# Altium PCB test.PcbDoc
Units mil, origin at the board's own origin, x right, y up, seen from the top; angles counter-clockwise.
Board outline 3295 x 3315 mil, 2 copper layers (Top Layer, Bottom Layer); 58 components, 40 nets, 178 pads, 24 vias.
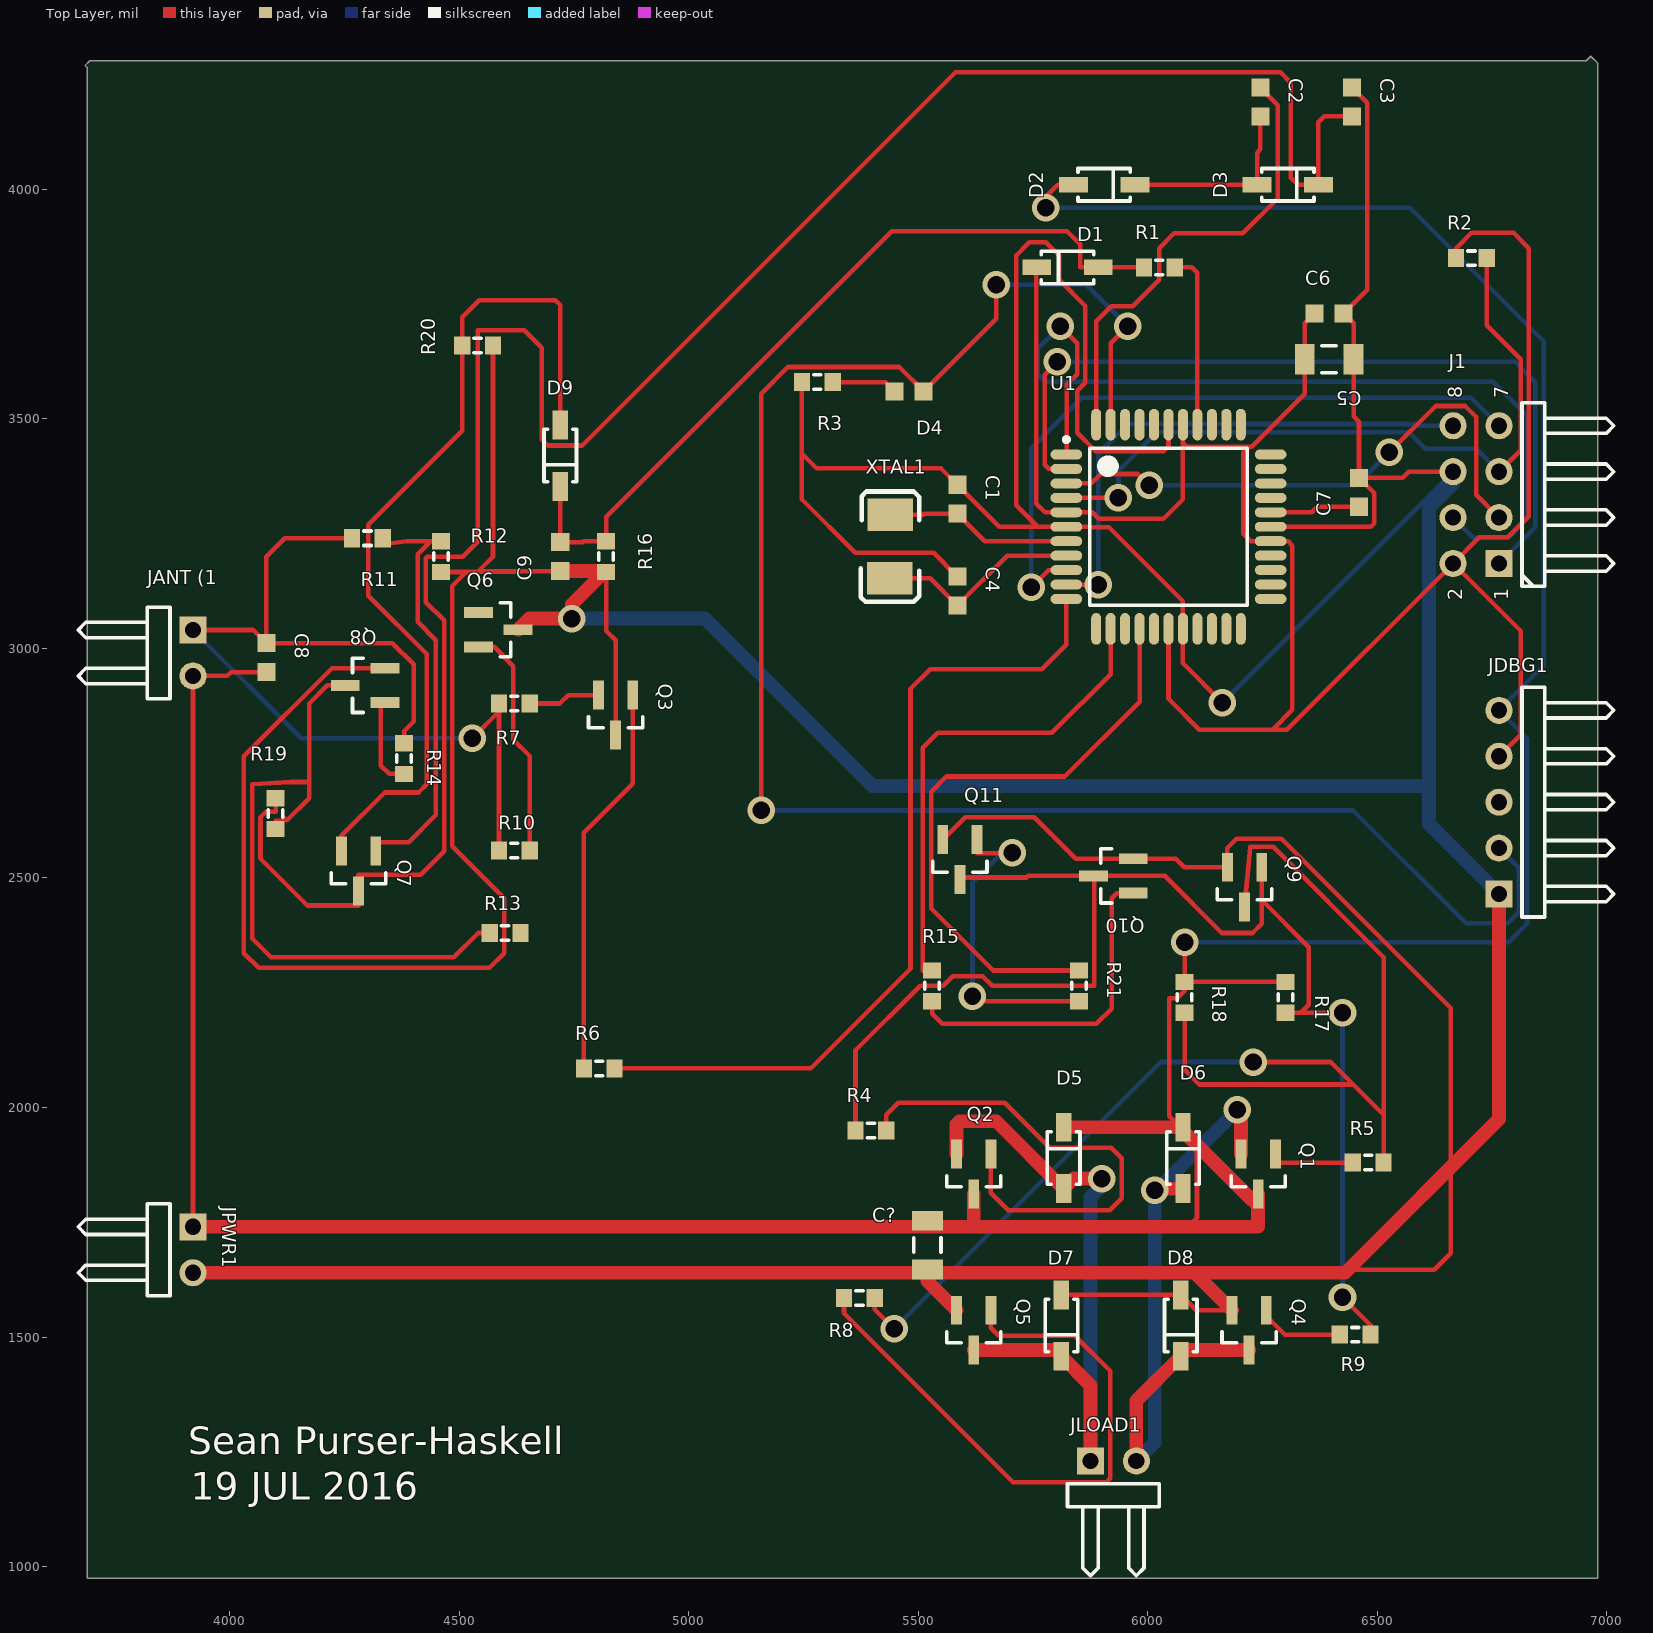
[diagram p0: Top Layer view]
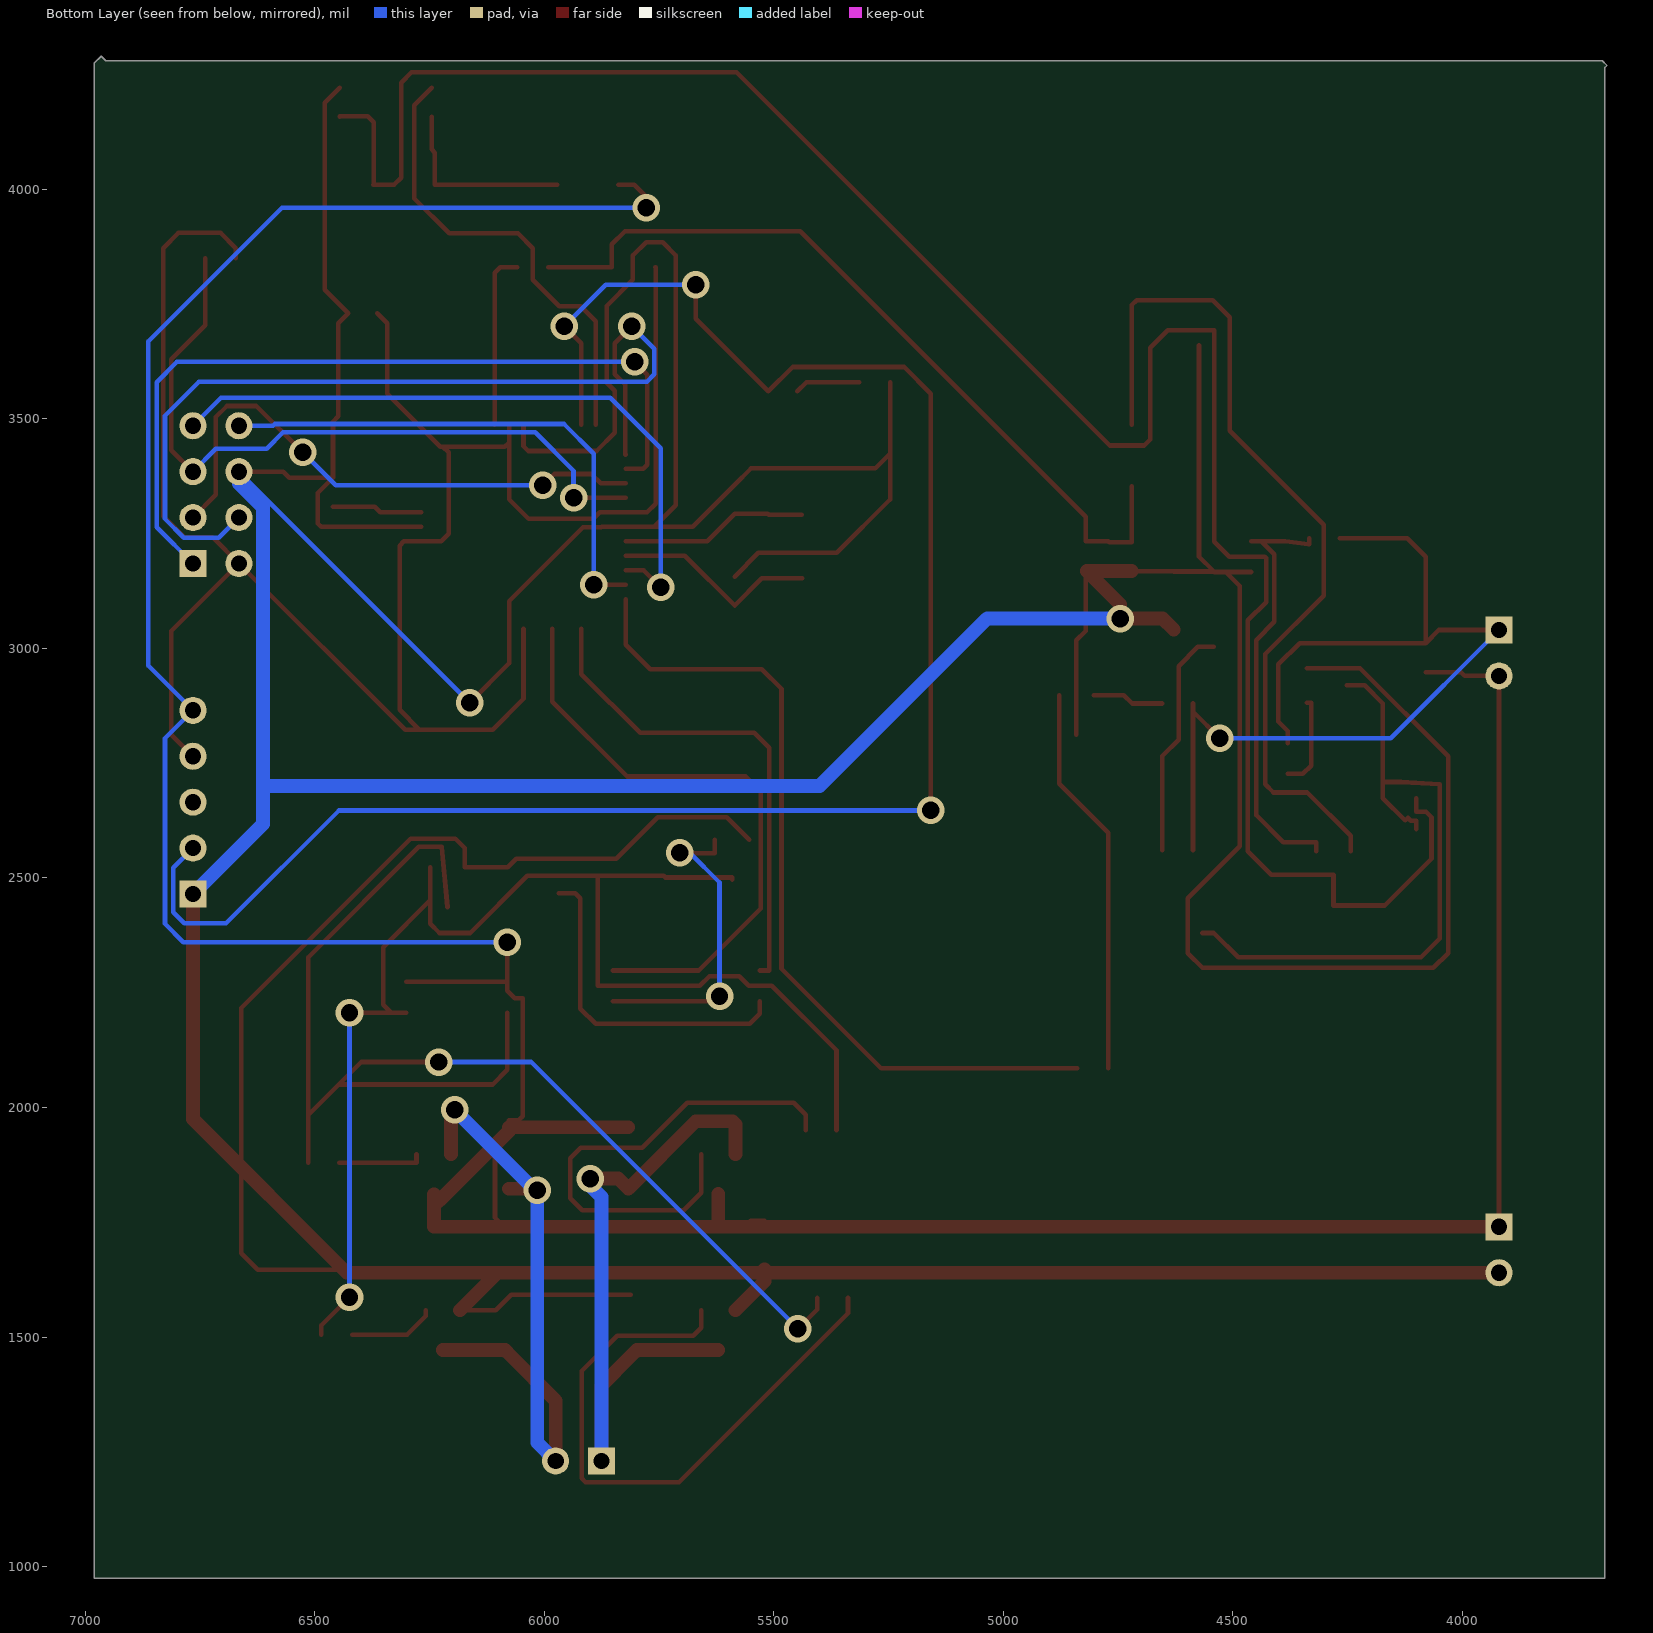
[diagram p1: Bottom Layer view, seen from below]

## Layer stack, top to bottom
Top Layer: signal copper 1.4
Dielectric: dielectric 12.6, FR-4, Dk 4.8
Bottom Layer: signal copper 1.4

## Board outline
5990,975 3690,975 3690,4265 3685,4270 3695,4280 6800,4280 6955,4280 6965,4290 6980,4275 6980,975

## Design rules (kind name [scope] priority, off if disabled: settings)
Clearance [All] p1: gap=8
MinimumSolderMaskSliver [All] p1: minsoldermaskwidth=0
PolygonConnect [All] p1: connectstyle=Relief reliefconductorwidth=10 reliefentries=4 polygonreliefangle="90 Angle"
RoomDefinition test [InComponentClass('test')] p1 off: confinementstyle=ConfineIn formatcopy=TRUE lockcomponents=FALSE outline 7025,1035 7205,1035 7205,1225 7025,1225
RoutingVias [All] p1: holewidth=38 width=60 viastyle="Through Hole" minholewidth=38 minwidth=60 maxholewidth=100 maxwidth=100
SilkToSilkClearance [All] p1: silktosilkclearance=7
SilkscreenOverComponentPads [All] p1: minsilkscreentomaskgap=1
SolderMaskExpansion [All] p1: expansion=4
Width [All] p1: maxlimit=100 minlimit=8 preferedwidth=10 minimp=50.000000 maximp=50.000000 favimp=50.000000
25 further rules are at their usual default settings.

## Components (designator, comment, footprint, x,y, rotation, side; value= is the part's Value field where it differs from the comment)
C1 "18pF" CAPC1608N 5585,3325 r270 top
C2 "10uF" CAPC1608N 6245,4190 r270 top
C3 "10uF" CAPC1608N 6445,4190 r270 top
C4 "18pF" CAPC1608N 5585,3125 r270 top
C5 "10uF" CAPC3216L 6395,3630 r180 top
C6 "100nF" CAPC1608N 6395,3730 r0 top
C7 "100nF" CAPC1608N 6460,3340 r90 top
C8 "3320pF" CAPC1608N 4080,2980 r270 top
C9 "1uF" CAPC1608N 4720,3200 r90 top
C? "10uF" CAPC3216L 5520,1700 r90 top
D1 "MBR0540" SOD123/X.85 5825,3830 r0 top
D2 "MBR0540" SOD123/X.85 5905,4010 r180 top
D3 "MBR0540" SOD123/X.85 6305,4010 r180 top
D4 "LED3" CAPC1608N 5480,3560 r180 top
D5 "MBR0540" SOD123/X.85 5816.69,1890 r270 top
D6 "MBR0540" SOD123/X.85 6076.69,1890 r270 top
D7 "MBR0540" SOD123/X.85 5811.69,1525 r90 top
D8 "MBR0540" SOD123/X.85 6071.69,1525 r90 top
D9 "MBR0540" SOD123/X.85 4720,3420 r90 top
J1 "XSP" HDR2X4H 6765,3185 r90 top
"JANT (1" "Header 2H" HDR1X2H 3920,3040 r270 top
JDBG1 "Header 5H" HDR1X5H 6765,2465 r90 top
JLOAD1 "Header 2H" HDR1X2H 5875,1230 r0 top
JPWR1 "Header 2H" HDR1X2H 3920,1740 r270 top
Q1 "BSS806N" BSS806N 6240,1880 r270 top
Q2 "BSS806N" BSS806N 5620,1880 r270 top
Q3 "BSS806N" BSS806N 4840,2880 r270 top
Q4 "BSS806N" BSS806N 6220,1540 r270 top
Q5 "BSS806N" BSS806N 5620,1540 r270 top
Q6 "BSS806N" BSS806N 4560,3040 r0 top
Q7 "BSS806N" BSS806N 4280,2540 r270 top
Q8 "BSS806N" BSS806N 4320,2920 r180 top
Q9 "BSS806N" BSS806N 6210,2505 r270 top
Q10 "BSS806N" BSS806N 5950,2505 r180 top
Q11 "BSS806N" BSS806N 5590,2565 r270 top
R1 "10k" RESC1608N 6025,3830 r0 top
R2 "10k" RESC1608N 6705,3850 r0 top
R3 "300" RESC1608N 5280,3580 r180 top
R4 "100" RESC1608N 5396.69,1950 r0 top
R5 "100" RESC1608N 6480,1880 r0 top
R6 "100" RESC1608N 4805,2085 r0 top
R7 "10" RESC1608N 4620,2880 r0 top
R8 "100" RESC1608N 5371.69,1585 r180 top
R9 "100" RESC1608N 6451.69,1505 r0 top
R10 "50" RESC1608N 4620,2560 r0 top
R11 "10k" RESC1608N 4300,3240 r180 top
R12 "10k" RESC1608N 4460,3200 r90 top
R13 "100" RESC1608N 4600,2380 r180 top
R14 "100" RESC1608N 4380,2760 r270 top
R15 "100" RESC1608N 5530,2265 r90 top
R16 "100k" RESC1608N 4820,3200 r90 top
R17 "1k" RESC1608N 6300,2240 r270 top
R18 "1k" RESC1608N 6080,2240 r270 top
R19 "1k" RESC1608N 4100,2640 r270 top
R20 "10k" RESC1608N 4540,3660 r180 top
R21 "100" RESC1608N 5850,2265 r270 top
U1 "ATmega644A-AU" 44A_N 6045,3265 r0 top
XTAL1 "ABM7-8.000MHZ-D2Y-T" XTAL 5425,3225 r270 top

## Footprints (in the part's own frame and the unit in brackets; to place one, negate y for a bottom-side part, rotate by r counter-clockwise, add the part's x,y. Pads: shape width x height; smd on the part's side, far side on the other; paste and mask are expansions set on the pad)
44A_N [mm] "Thin QFP, 44-Leads, Body 10x10mm, Pitch 0.8mm, IPC Medium Density"
  oval 1.75x0.55 smd: 1(-5.65,4) 2(-5.65,3.2) 3(-5.65,2.4) 4(-5.65,1.6) 5(-5.65,0.8) 6(-5.65,0) 7(-5.65,-0.8) 8(-5.65,-1.6) 9(-5.65,-2.4) 10(-5.65,-3.2) 11(-5.65,-4) 23(5.65,-4) 24(5.65,-3.2) 25(5.65,-2.4) 26(5.65,-1.6) 27(5.65,-0.8) 28(5.65,0) 29(5.65,0.8) 30(5.65,1.6) 31(5.65,2.4) 32(5.65,3.2) 33(5.65,4)
  oval 0.55x1.75 smd: 12(-4,-5.65) 13(-3.2,-5.65) 14(-2.4,-5.65) 15(-1.6,-5.65) 16(-0.8,-5.65) 17(0,-5.65) 18(0.8,-5.65) 19(1.6,-5.65) 20(2.4,-5.65) 21(3.2,-5.65) 22(4,-5.65) 34(4,5.65) 35(3.2,5.65) 36(2.4,5.65) 37(1.6,5.65) 38(0.8,5.65) 39(0,5.65) 40(-0.8,5.65) 41(-1.6,5.65) 42(-2.4,5.65) 43(-3.2,5.65) 44(-4,5.65)
  silkscreen extent -5.77,-4.35 4.35,4.95, body extent -5,-5 5,5, height 1.2
BSS806N [mm]
  rect 1.6x0.6 smd: 1(-0.465,0.966) 2(-0.465,-0.934) 3(1.735,0.016)
  silkscreen extent 0.74,-1.48 1.34,1.52, body extent -0.07,-1.48 1.34,1.52, height 1.1
CAPC1608N [mm] "Chip Capacitor, Body 1.6x0.8mm, IPC Medium Density"
  rect 1x1 smd: 1(-0.8,0) 2(0.8,0)
  body extent -0.87,-0.48 0.87,0.48, height 0.85
CAPC3216L [mm] "Chip Capacitor, Body 3.2x1.6mm, IPC High Density"
  rect 1.1x1.7 smd: 1(-1.35,0) 2(1.35,0)
  silkscreen extent -0.4,-0.75 0.4,0.75, body extent -1.7,-0.9 1.7,0.9, height 1.3
HDR1X2H [mm] "Connector; Header; 2 Position; Right Angle"
  rect 1.5x1.5 hole 0.9: 1(0,0)
  round 1.5 hole 0.9: 2(2.54,0)
  silkscreen extent -1.27,-6.35 3.81,-1.27
HDR1X5H [mm] "Connector; Header; 5 Position; Right Angle"
  rect 1.5x1.5 hole 0.9: 1(0,0)
  round 1.5 hole 0.9: 2(2.54,0) 3(5.08,0) 4(7.62,0) 5(10.16,0)
  silkscreen extent -1.27,-6.35 11.43,-1.27
HDR2X4H [mm] "Connector; Header; 4x2 Position; Right Angle"
  rect 1.5x1.5 hole 0.9: 1(0,0)
  round 1.5 hole 0.9: 2(0,2.54) 3(2.54,0) 4(2.54,2.54) 5(5.08,0) 6(5.08,2.54) 7(7.62,0) 8(7.62,2.54)
  silkscreen extent -1.27,-6.35 8.89,-1.27
RESC1608N [mm] "Chip Resistor, Body 1.6x0.8mm, IPC Medium Density"
  rect 0.9x1 smd: 1(-0.85,0) 2(0.85,0)
  silkscreen extent -0.2,-0.4 0.2,0.4, body extent -0.85,-0.48 0.85,0.48, height 0.6
SOD123/X.85 [mm] "SOD-123; 2 Leads; Body 2.7 x 1.6 mm, (LxW)"
  rect 1.6x0.85 smd: 1(-1.7,0) 2(1.7,0)
  silkscreen extent -1.45,-0.9 1.45,0.9
XTAL [mm]
  rect 1.8x2.5 smd: 1(1.834,0.329) 2(-1.691,0.354)
  silkscreen extent -2.97,-1.27 3.13,1.95, body extent -2.2,-0.89 2.49,1.4, height 2.54

## Part data
C1 C2 C3 C4 C5 C8 C9 C?: library part Cap, "Capacitor"
C6 C7: library part CAP, "Capacitor"
D1 D2 D3 D5 D6 D7 D8 D9: library part Diode, "Default Diode"
D4: "Typical BLUE SiC LED"
J1: library part "Header 4X2H", "Header, 4-Pin, Dual row, Right Angle"
"JANT (1" JLOAD1 JPWR1: "Header, 2-Pin, Right Angle"
JDBG1: "Header, 5-Pin, Right Angle"
R1 R2 R3 R4 R5 R6 R7 R8 R9 R10 R11 R12 R13 R14 R15 R16 R17 R18 R19 R20 R21: library part Res2, "Resistor"
U1: "8-bit AVR Microcontroller, 64KB Flash, 2KB EEPROM, 4KB SRAM, 44-pin TQFP, Industrial Grade (-40°C to 85°C)"

## Via types
v1: diameter 60, hole 38, Top Layer to Bottom Layer, 24 vias

## Nets (pads, with @x,y where several pads share a name; then routed paths per layer and width w, separated by ;. In a path a pad name is that pad's centre, name@x,y a point inside that pad or via, vN(x,y) a via of type N, cw(c..) or ccw(c..) an arc to the next point about the centre after c; other vN are vias at no path point)
DBG_LED: D4.1 JDBG1.2 U1.43 | length 4077.9
  Top Layer w10: v1(5158,2647) 5158,3555 5216,3613 5458.5,3613 D4.1 5670,3718.5 v1(5670,3792) ; U1.43 5919.02,3665.02 v1(5956,3702)
  Bottom Layer w10: v1(5158,2647) 6447,2647 6693,2401 6784,2401 6808,2425 6808,2522 JDBG1.2 ; v1(5670,3792) 5866,3792 v1(5956,3702)
DBL_WAVE: C2.1 U1.44 | length 1029.3
  Top Layer w10: U1.44 5887.52,3713.04 5920,3745.52 5967.52,3745.52 6025,3803 6025,3872 6057,3904 6207,3904 6283,3980 6283,4183.5 C2.1
GND: C1.1 C3.1 C4.1 C5.1 C6.2 C7.2 C9.1 C?.1 D7.2 D8.2 J1.6 JDBG1.1 JPWR1.2 Q3.3 Q4.2 Q5.2 Q6.3 Q8.2 Q9.2 Q10.2 Q11.2 R3.2 R12.1 R16.1 R20.1 U1.6 U1.18 U1.28 U1.39 | length 19948.2
  Top Layer w10: Q8.2 4222.77,2956.77 4031,2765 4031,2336 4063,2304 4566,2304 4598,2336 4598,2456 4485,2569 4485,3136 4515.54,3166.54 ; R12.1 4515.54,3166.54 ; R20.1 4573.46,3200 4541.97,3168.5 ; Q3.3 4840.63,3017.37 4820,3038 R16.1 4816.06,3166.54 4770.97,3166.54 4769,3168.5 C9.1 ; C?.1 6436.85,1646.85 6624,1646.85 6660,1682.85 6660,1870 6660,2216.65 6290.84,2585.8 6193.8,2585.8 6173.23,2565.23 Q9.2 6079.47,2523.31 6061,2541.77 Q10.2 5843.23,2541.77 5753,2632 5601.92,2632 Q11.2 ; C4.1 5533.5,3208 5363,3208 5246.54,3324.46 5246.54,3424 ; D7.2 D8.2 6105.32,1558.31 Q4.2 ; U1.39 6045,3440 6035,3430 5886,3430 5846,3470 5846,3561 5864,3579 5864,3745.85 5806.65,3803.2 5806.65,3856 5777.65,3885 5742,3885 5713,3856 5713,3312 5760,3265 ; v1(6162,2882) 6076.5,2967.5 U1.18 6076.5,3103 5915.5,3264 5876,3264 5875,3265 U1.6 ; U1.28 6486,3265 6493,3272 6493,3338.5 C7.2 ; C3.1 6478,4188.5 6478,3781.5 C6.2 6448.15,3708.35 C5.1 6448.15,3505.85 6460,3494 C7.2 ; J1.6 6568.5,3385 6555,3371.5 C7.2 ; 4515.54,3166.54 4540,3166.54 ; 4515.54,3166.54 4540,3166.54 ; 4540,3166.54 4541.97,3168.5 ; 4540,3166.54 4541.97,3168.5 ; 4540,3166.54 C9.1 ; 4541.97,3168.5 C9.1 ; 5246.54,3424 5278.54,3392 5549.5,3392 C1.1 5676.5,3265 5760,3265 ; 5246.54,3424 R3.2 5246.54,3424 ; 5760,3265 U1.6 ; 5760,3265 U1.6
  Top Layer w30: JPWR1.2 5660,1640 6085,1640 6101.53,1640 ; Q6.3 4652.68,3065 v1(4745,3065) 4745,3095.47 4818.03,3168.5 C9.1 ; C?.1 5520,1640 5520,1621.53 Q5.2 ; Q4.2 6101.53,1640 ; JDBG1.1 6765,1975 6430,1640 6101.53,1640
  Bottom Layer w10: v1(6162,2882) J1.6
  Bottom Layer w30: v1(4745,3065) 5035,3065 5400,2700 6612.47,2700 ; J1.6 6665,3359.29 6612.47,3306.76 6612.47,2700 ; JDBG1.1 6612.47,2617.53 6612.47,2700
LOAD_A: Q9.1 Q10.3 Q11.3 R4.1 R9.2 R17.2 | length 3107.2
  Top Layer w10: R4.1 5363.23,2124.23 5504,2265 5553.93,2265 5574.87,2285.94 5639.93,2285.94 5660.87,2265 5883,2265 Q10.3@5883,2504.37 ; Q11.3 5590.63,2501.02 5736.33,2501.02 5739.68,2504.37 Q10.3 ; v1(6424,1587) 6485.16,1525.84 R9.2 ; v1(6424,2206.54) 6333.22,2206.54 ; Q10.3 Q10.3@5883,2504.37 ; Q10.3 Q10.3@5883,2504.37 ; Q10.3@5883,2504.37 6037,2504.37 6161.37,2380 6228.03,2380 6248.03,2400 6248.03,2451.97 ; 6248.03,2451.97 Q9.1 6248.03,2451.97 ; 6248.03,2451.97 6350.69,2349.31 6350.69,2224 6333.22,2206.54 ; 6333.22,2206.54 R17.2 6333.22,2206.54
  Bottom Layer w10: v1(6424,1587) v1(6424,2206.54)
LOAD_B: Q9.3 R5.2 R8.1 R18.2 | length 3110.7
  Top Layer w10: R8.1 5405.16,1560 v1(5447.16,1518) ; R18.2 6080,2082 6112,2050 6447.46,2050 ; Q9.3 6223,2567.8 6273,2567.8 6513.46,2327.34 6513.46,1984 ; v1(6230,2099) 6398.46,2099 6447.46,2050 ; 6447.46,2050 6513.46,1984 ; 6447.46,2050 6513.46,1984 ; 6513.46,1984 R5.2 6513.46,1984
  Bottom Layer w10: v1(5447.16,1518) 6028.16,2099 v1(6230,2099)
LOAD_DIR: R21.1 U1.15 | length 1326.2
  Top Layer w10: R21.1 5663,2298.46 5528,2433.46 5528,2688 5561,2721 5819,2721 5982.01,2884.01 U1.15
LOAD_EN: R15.2 U1.13 | length 1079.4
  Top Layer w10: R15.2 5510,2298.46 5510,2784 5542,2816 5791.02,2816 5919.02,2944 U1.13
MISO: J1.1 U1.2 | length 1773.8
  Top Layer w10: v1(5803,3624) 5775.11,3596.11 5775.11,3399.87 5784,3390.98 U1.2
  Bottom Layer w10: v1(5803,3624) 6800,3624 6844,3580 6844,3264 J1.1
MOSI: J1.4 U1.1 | length 1955.1
  Top Layer w10: v1(5809,3702) 5846,3665 5846,3597 5823.79,3574.79 5823.79,3422.48 U1.1
  Bottom Layer w10: v1(5809,3702) 5760,3653 5760,3597 5776,3581 6752,3581 6826,3507 6826,3282 6785,3241 6709,3241 J1.4
NetC1_2: C1.2 U1.7 XTAL1.2 | length 409.3
  Top Layer w10: XTAL1.2 5511,3291.58 5512.93,3293.5 C1.2 5645,3233.5 U1.7
NetC2_2: C2.2 D2.1 D3.2 | length 417.5
  Top Layer w10: D2.1 D3.2 6238.07,4080 6245,4086.93 C2.2
NetC4_2: C4.2 U1.8 XTAL1.1 | length 454.1
  Top Layer w10: XTAL1.1 5525.71,3152.8 C4.2 5693.5,3202.01 U1.8
NetC7_1: C7.1 U1.29 | length 197.5
  Top Layer w10: U1.29 6357,3296.5 6369.01,3308.5 C7.1
NetC8_1: "JANT (1.1" C8.1 R7.1 R10.1 R11.2 R14.1 | length 2209.7
  Top Layer w10: 3920,3040 4051.5,3040 C8.1 ; R11.2 4120,3240 4080,3200 C8.1 ; R14.1 4380,2820 4400.8,2840.8 4400.8,2965.2 4354.5,3011.5 C8.1 ; v1(4528,2804) R7.1@4586.54,2862.54 ; R10.1 R7.1@4586.54,2862.54 ; R7.1@4586.54,2862.54 R7.1 R7.1@4586.54,2862.54
  Bottom Layer w10: 3920,3040 4156,2804 v1(4528,2804)
NetD4_2: D4.2 R3.1 | length 143.3
  Top Layer w10: R3.1 5428.5,3580 D4.2
NetD5_2: D5.2 D7.1 JLOAD1.1 Q2.2 Q5.3 | length 1530.8
  Top Layer w30: Q2.2 5583.23,1963.23 5590,1970 5669.76,1970 D5.2 5838.62,1845 v1(5900,1845) ; Q5.3 5798.07,1471.69 D7.1 5875,1394.76 JLOAD1.1
  Bottom Layer w30: JLOAD1.1 5875,1805 5900,1830 v1(5900,1845)
NetD6_2: D6.2 D8.1 JLOAD1.2 Q1.2 Q4.3 | length 1454.2
  Top Layer w30: JLOAD1.2 5975,1361.38 D8.1 6085.31,1471.69 Q4.3 ; v1(6015,1820) 6018.07,1823.07 D6.2 ; v1(6195,1995) 6205,1995 6203.23,1993.23 Q1.2
  Bottom Layer w30: JLOAD1.2 6015,1270 v1@6015,1815 ; v1(6015,1820) v1@6015,1815 ; v1(6195,1995) 6017.5,1817.5 v1@6015,1815
NetD9_2: D9.2 Q7.2 R20.2 | length 1914.9
  Top Layer w10: Q7.2 4243.23,2592 4337.39,2686.16 4411.32,2686.16 4429.16,2704 4429.16,2987.84 4302,3115 4302,3269.46 4506.54,3474 R20.2 4506.54,3721.07 4544,3758.54 4709.46,3758.54 4720,3748 D9.2
NetQ1_1: Q1.1 R5.1 | length 186.8
  Top Layer w10: Q1.1 6278.03,1880 R5.1
NetQ2_1: Q2.1 R4.2 | length 1090.6
  Top Layer w10: R4.2 5430.16,1984.16 5456,2010 5688,2010 5786,1912 5920,1912 5943,1889 5943,1802 5917,1776 5696,1776 5658.03,1813.97 Q2.1
NetQ3_1: Q3.1 R6.1 | length 857.4
  Top Layer w10: R6.1 4771.54,2598.54 4878.03,2705.03 Q3.1
NetQ3_2: Q3.2 R7.2 | length 157.3
  Top Layer w10: R7.2 4719,2880 4737.31,2898.31 Q3.2
NetQ4_1: Q4.1 R9.1 | length 189.7
  Top Layer w10: Q4.1 6258.03,1545.66 6298.69,1505 R9.1
NetQ5_1: Q5.1 R8.2 | length 1339.7
  Top Layer w10: R8.2 5338.23,1552 5706.23,1184 5910,1184 5918,1192 5918,1426 5841,1503 5675.03,1503 5658.03,1520 Q5.1
NetQ6_2: Q6.2 R10.2 | length 509.6
  Top Layer w10: Q6.2 4576,3003.23 4618,2961.23 4618,2801 4653.46,2765.54 R10.2
NetQ7_1: Q7.1 R11.1 R12.2 | length 939.9
  Top Layer w10: Q7.1 4318.03,2578 4390,2578 4449,2637 4449,3018 4409.31,3057.69 4409.31,3204.81 4437.96,3233.46 ; R11.1 4333.46,3226.93 4335.08,3227.13 4385.65,3233.46 4437.96,3233.46 ; R12.2 4437.96,3233.46
NetQ8_1: Q8.1 R14.2 | length 204.5
  Top Layer w10: Q8.1 4329.31,2881.97 4329.31,2744.69 4347.46,2726.54 R14.2
NetQ8_3: Q8.3 R13.2 R19.2 | length 1469.4
  Top Layer w10: R19.2 4100,2625 4112,2625 4118.23,2631.23 4121.46,2628 4124.23,2625.23 4173,2674 ; Q8.3 4212.37,2919.37 4173,2880 4173,2709 ; R13.2 4541,2380 4488,2327 4090,2327 4049,2368 4049,2704 4133,2709 4173,2709 ; 4173,2674 4173,2709 ; 4173,2674 4173,2709
NetQ10_1: Q10.1 R15.1 | length 734.2
  Top Layer w10: R15.1 5530,2204 5552,2182 5888,2182 5921,2215 5921,2456 5931.97,2466.97 Q10.1
NetQ11_1: Q11.1 R21.2 | length 704.9
  Top Layer w10: v1(5618,2242) 5628.46,2231.54 R21.2 ; Q11.1 5628.03,2554 5682,2554 5683,2555 v1(5705,2555)
  Bottom Layer w10: v1(5618,2242) 5618,2490 5683,2555 v1(5705,2555)
NetR1_2: R1.2 U1.37 | length 385.1
  Top Layer w10: R1.2 6096,3830 6107.99,3818.01 U1.37
RESET: J1.5 R2.2 U1.4 | length 1586.6
  Top Layer w10: U1.4 v1(5936,3327.99) ; R2.2 6738.46,3703.54 6812,3630 6812,3432 J1.5
  Bottom Layer w10: v1(5936,3327.99) 5936,3387 6019.81,3470.81 6568.89,3470.81 6604.7,3435 6715,3435 J1.5
RFID_ADC: C9.2 D1.2 D9.1 R1.1 R16.2 | length 1767.1
  Top Layer w10: D9.1 C9.2 4769,3231.5 4770.97,3233.46 R16.2 4820,3287 5442,3909 5824,3909 5853,3880 5853,3830 D1.2 R1.1
RXD_FTDI: J1.8 U1.10 | length 1155.8
  Top Layer w10: U1.10 v1(5892,3139.02)
  Bottom Layer w10: v1(5892,3139.02) 5892,3424 5956.81,3488.81 6586.89,3488.81 6590.7,3485 J1.8
SCK: J1.3 U1.3 | length 1232.6
  Top Layer w10: U1.3 5877,3359.49 5897.51,3380 5978,3380 v1(6003,3355) ; v1(6526,3427) 6627,3528 6691,3528 6715,3504 6715,3335 J1.3
  Bottom Layer w10: v1(6003,3355) 6454,3355 v1(6526,3427)
START_OSC: R6.2 U1.11 | length 1823.3
  Top Layer w10: R6.2 5266,2085 5483,2302 5483,2912 5526,2955 5769,2955 5822,3008 5822,3107.52 U1.11
TXD_FTDI: J1.7 U1.9 | length 1484.9
  Top Layer w10: v1(5746,3133) 5783.51,3170.51 U1.9
  Bottom Layer w10: v1(5746,3133) 5746,3436 5856,3546 6704,3546 J1.7
VBATT: "JANT (1.2" C8.2 C?.2 D2.2 D5.1 D6.1 JDBG1.5 JPWR1.1 Q1.3 Q2.3 R17.1 R18.1 | length 9556.9
  Top Layer w10: JPWR1.1 3920,2940 3995,2940 4003.5,2948.5 C8.2 ; C?.2 5549.7,1753.15 5553.48,1749.37 5620.63,1749.37 ; Q2.3 5620.63,1760 5640.63,1740 6087,1740 6107,1760 6107,1918.7 6107,1920 6076.69,1950.31 6073.38,1953.62 6070.07,1956.93 D5.1 ; v1(5778,3960) 5778,3984 5804,4010 D2.2 ; D6.1 6076.69,1972 6056,1972 6047,1981 6047,2238 6064,2238 6080,2254 R18.1 ; v1(6080,2360) R18.1 ; Q1.3@6230.7,1795 6240,1795 6240,1740 ; R17.1 R18.1
  Top Layer w30: JPWR1.1 6240,1740 Q1.3@6240,1811.06 ; 5620.63,1749.37 Q2.3 ; D5.1 D6.1 6076.69,1949.01 6227.32,1798.38 Q1.3@6230.7,1795
  Bottom Layer w10: v1(5778,3960) 6571,3960 6862,3669 6862,2962 JDBG1.5 6826,2804 6826,2400 6786,2360 v1(6080,2360)
VCC: C5.2 C6.1 D1.1 J1.2 JDBG1.4 R2.1 U1.5 U1.17 U1.27 U1.38 | length 4916.4
  Top Layer w10: D1.1 5757.11,3830 5757.11,3315.39 5776,3296.5 U1.5 5878.5,3296.5 5893,3282 6033.5,3282 6076.5,3324.99 6076.5,3448 ; U1.17 6045,2890 6112,2823 ; C6.1 6341.85,3708.35 C5.2 6341.85,3554.85 6226,3439 ; R2.1 6671.54,3872 6704.54,3905 6797,3905 6830,3872 6830,3288 6784,3242 6722,3242 J1.2 ; JDBG1.4 6812,2812 6812,3038 J1.2 ; 6076.5,3448 6085.5,3439 6220.56,3439 ; 6076.5,3448 U1.38 6076.5,3448 ; 6112,2823 6272,2823 ; 6112,2823 6272,2823 ; 6220.56,3439 6208,3427 6208,3249.5 6224,3233.5 U1.27 6305.5,3233.5 6315,3224 6315,2866 6272,2823 ; 6220.56,3439 6226,3439 ; 6220.56,3439 6226,3439 ; 6272,2823 6303,2823 J1.2
VDBL: C3.2 D3.1 Q7.3 R19.1 | length 4761
  Top Layer w10: R19.1 4100,2644 4079,2644 4067,2632 4067,2541.63 4168.63,2440 4280.63,2440 Q7.3 4280.63,2507 4416,2507 4467,2558 4467,3061 4427.31,3100.69 4427.31,3197 4430.31,3200 4508,3200 4540,3232 4540,3693 4642,3693 4680,3655 4680,3455 4693,3442 4768,3442 5581,4255 6289,4255 6311.71,4232.29 6311.71,4025.29 6327,4010 D3.1@6371,4010 ; C3.2 6445,4159 6384,4159 6371,4146 D3.1@6371,4010 ; D3.1@6371,4010 D3.1 D3.1@6371,4010
pads on no net: JDBG1.3 Q6.1 R13.1 U1.12 U1.14 U1.16 U1.19 U1.20 U1.21 U1.22 U1.23 U1.24 U1.25 U1.26 U1.30 U1.31 U1.32 U1.33 U1.34 U1.35 U1.36 U1.40 U1.41 U1.42

## Silkscreen, mask and mechanical layers (free items; w line width, h text height)
Top Overlay:
  text "Sean Purser-Haskell" at 3910,1245 h60
  text "19 JUL 2016" at 3915,1145 h60

## Text inside footprints (layer, text, board x,y; h text height)
J1: Top Overlay "8" at 6685,3545 h30 r90; Top Overlay "7" at 6785,3545 h30 r90; Top Overlay "1" at 6785,3105 h30 r90; Top Overlay "2" at 6685,3105 h30 r90